# Altium PCB Modulo_Telemetros.PcbDoc
Units mil, origin at the board's own origin, x right, y up, seen from the top; angles counter-clockwise.
Board outline 3660 x 4090 mil, 2 copper layers (Top Layer, Bottom Layer); 58 components, 57 nets, 198 pads, 7 vias.
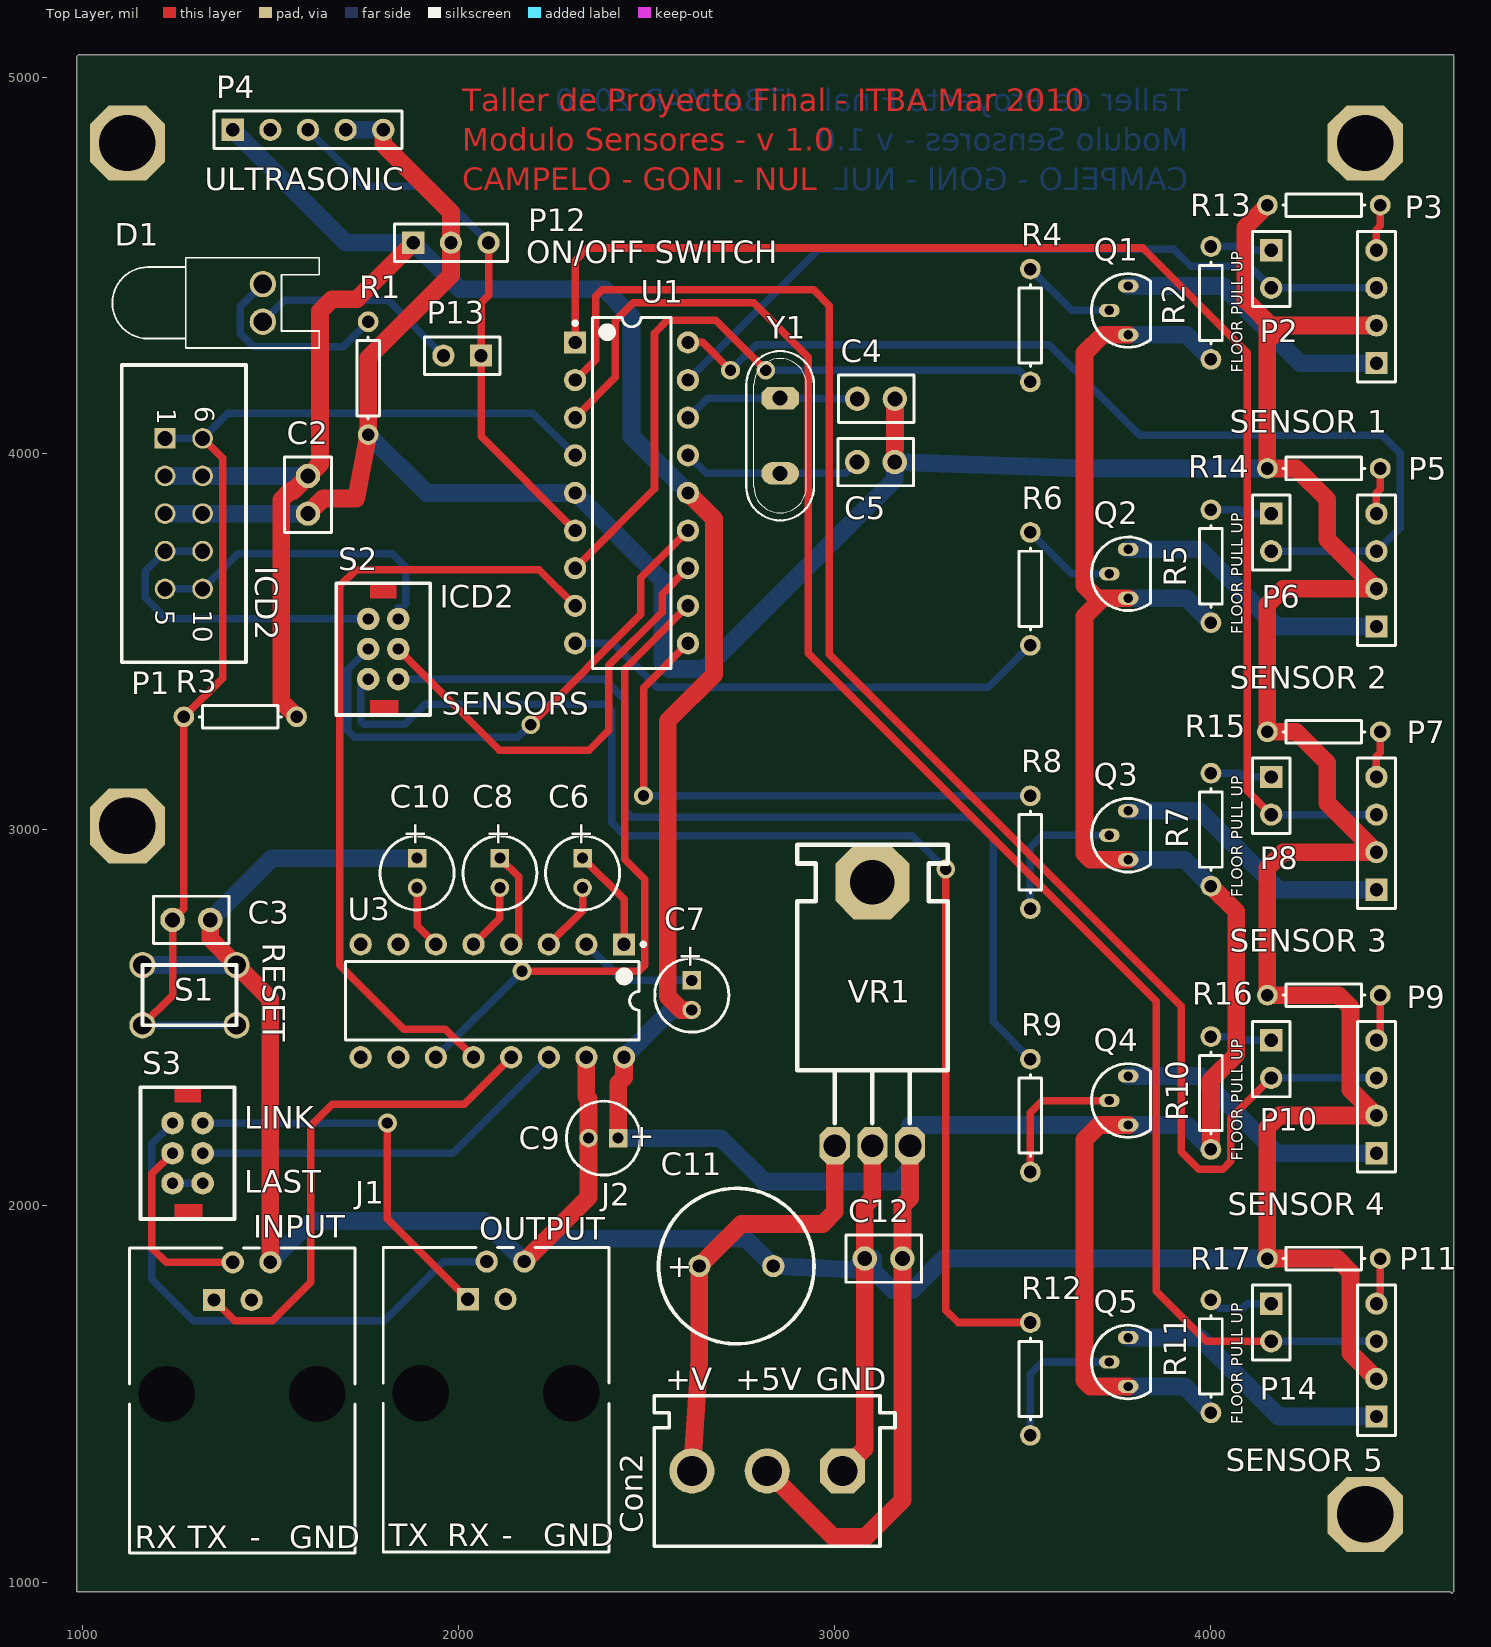
[diagram p0: Top Layer view]
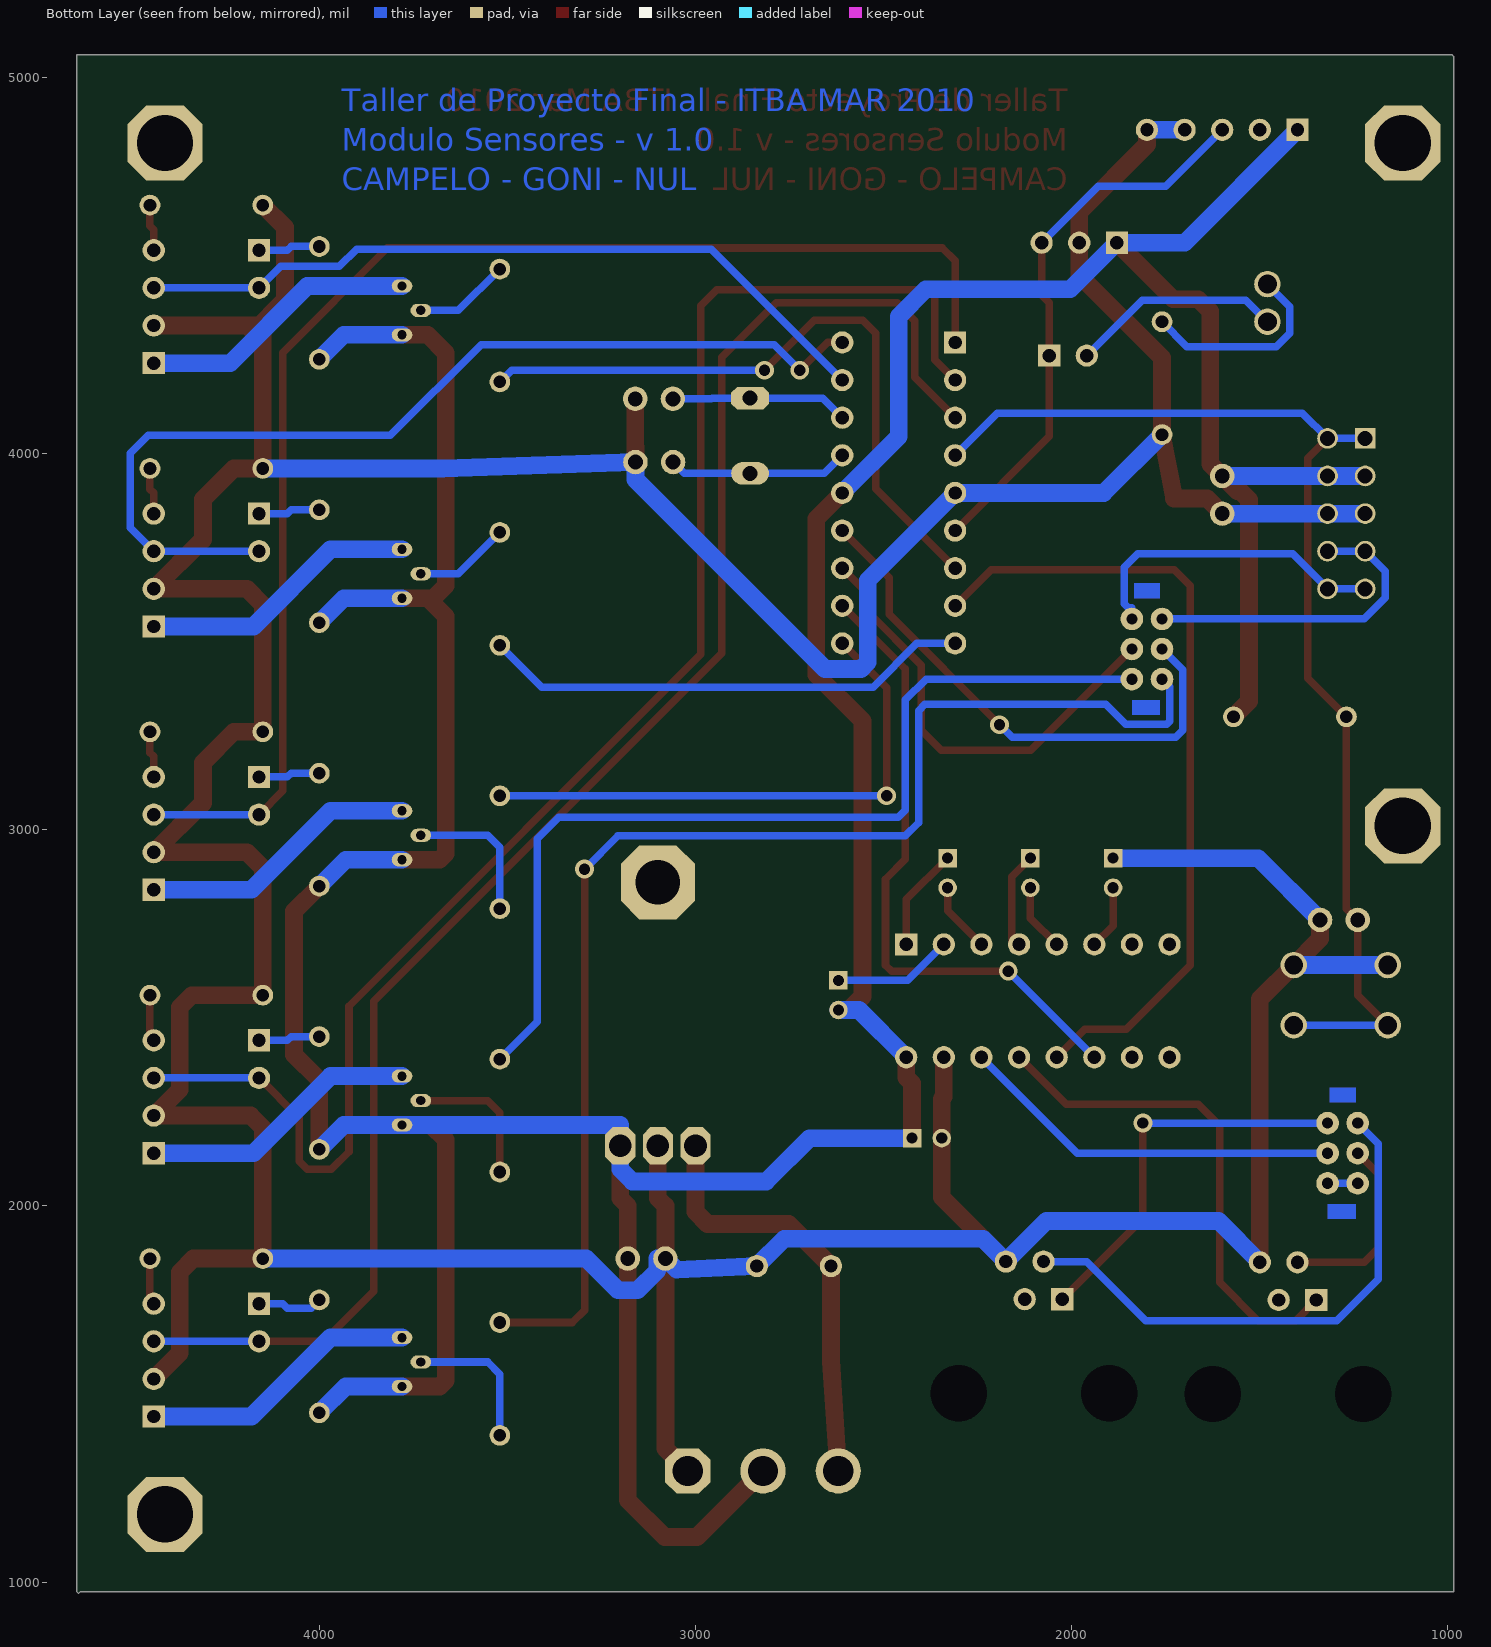
[diagram p1: Bottom Layer view, seen from below]

## Layer stack, top to bottom
Top Layer: signal copper 1.4
Dielectric: dielectric 12.6, FR-4, Dk 4.8
Bottom Layer: signal copper 1.4

## Board outline
985,5055 985,975 4635,975 4640,970 4645,975 4645,5060 990,5060 985,5055

## Design rules (kind name [scope] priority, off if disabled: settings)
Clearance [All] p1: gap=15
DiffPairsRouting [All] p1: maxlimit=10 minlimit=10 mostfreqgap=10 maxuncoupledlength=750
PolygonConnect [All] p1: connectstyle=Relief reliefconductorwidth=10 reliefentries=4 polygonreliefangle="90 Angle"
RoutingVias [All] p1: holewidth=30 width=50 viastyle="Through Hole" minholewidth=30 minwidth=50 maxholewidth=50 maxwidth=70
SilkscreenOverComponentPads [All] p1: minsilkscreentomaskgap=10
SolderMaskExpansion [All] p1: expansion=4
Width Signal [NOT (InNet('+5V VCC') OR InNet('+V LOGIC') OR InNet('GND') OR InNet('VCC_SENSOR_1') OR InNet('VCC_SENSOR_2') OR InNet('VCC_SENSOR_3') OR InNet('VCC_SENSOR_4') OR InNet('VCC_SENSOR_5'))] p1: maxlimit=25 minlimit=15 preferedwidth=20 minimp=50.000000 maximp=50.000000 favimp=50.000000
Width Power [(InNet('+5V VCC') OR InNet('+V LOGIC') OR InNet('GND') OR InNet('VCC_SENSOR_1') OR InNet('VCC_SENSOR_2') OR InNet('VCC_SENSOR_3') OR InNet('VCC_SENSOR_4') OR InNet('VCC_SENSOR_5'))] p2: maxlimit=47 minlimit=47 preferedwidth=47 minimp=50.000000 maximp=50.000000 favimp=50.000000
26 further rules are at their usual default settings.

## Components (designator, comment, footprint, x,y, rotation, side; value= is the part's Value field where it differs from the comment)
C2 "Cap" CAPR2.54-5.1x3.2 1600,3890 r90 top
C3 "Cap" CAPR2.54-5.1x3.2 1290,2760 r180 top
C4 "Cap" CAPR2.54-5.1x3.2 3110,4145 r180 top
C5 "Cap" CAPR2.54-5.1x3.2 3109.61,3977.01 r180 top
C6 "Cap Pol1" CAPPR2-5x6.8 2330,2885 r270 top
C7 "Cap Pol1" CAPPR2-5x6.8 2620,2560 r270 top
C8 "Cap Pol1" CAPPR2-5x6.8 2110,2885 r270 top
C9 "Cap Pol1" CAPPR2-5x6.8 2385,2180 r180 top
C10 "Cap Pol1" CAPPR2-5x6.8 1890,2885 r270 top
C11 "Cap Pol1" RB5-10.5 2738.43,1840 r0 top
C12 "Cap" CAPR2.54-5.1x3.2 3130,1860 r0 top
Con2 "POWER_A" My_CN3 3120,1095 r180 top
D1 "LED0" LED-0 1480,4400 r270 top
J1 "SERIAL A" 15-43-6245 1425,1077.95 r0 top
J2 "SERIAL B" 15-43-6245 2100,1080 r0 top
P1 "ICD2" HEADER10_5x2_B 1270,3840 r270 top
P2 "Pull UP (Piso)" HDR1X2 4160,4540 r270 top
P3 "Piso/Telemetro_1" HDR1X4 4440,4240 r90 top
P4 "Ultradonido" HDR1X5 1400,4860 r0 top
P5 "Piso/Telemetro_2" HDR1X4 4440,3540 r90 top
P6 "Pull UP (Piso)" HDR1X2 4160,3840 r270 top
P7 "Piso/Telemetro_3" HDR1X4 4440,2840 r90 top
P8 "Pull UP (Piso)" HDR1X2 4160,3140 r270 top
P9 "Piso/Telemetro_4" HDR1X4 4440,2140 r90 top
P10 "Pull UP (Piso)" HDR1X2 4160,2440 r270 top
P11 "Piso/Telemetro_5" HDR1X4 4440,1440 r90 top
P12 "ON/OFF SWITCH" HDR1X3 1880,4560 r0 top
P13 "LED1" HDR1X2 2060,4260 r180 top
P14 "Pull UP (Piso)" HDR1X2 4160,1740 r270 top
Q1 "BC327" TO-92A 3780,4380 r0 top
Q2 "BC327" TO-92A 3780,3680 r0 top
Q3 "BC327" TO-92A 3780,2985 r0 top
Q4 "BC327" TO-92A 3780,2280 r0 top
Q5 "BC327" TO-92A 3780,1585 r0 top
R1 "Res1" AXIAL-0.3 1760,4200 r270 top
R2 "Res1" AXIAL-0.3 4000,4400 r90 top (schematic designator R5)
R3 "Res1" AXIAL-0.3 1420,3300 r0 top
R4 "Res1" AXIAL-0.3 3520,4340 r90 top
R5 "Res1" AXIAL-0.3 4000,3700 r90 top (schematic designator R7)
R6 "Res1" AXIAL-0.3 3520,3640 r90 top
R7 "Res1" AXIAL-0.3 4000,3000 r90 top (schematic designator R10)
R8 "Res1" AXIAL-0.3 3520,2940 r270 top
R9 "Res1" AXIAL-0.3 3520,2240 r270 top
R10 "Res1" AXIAL-0.3 4000,2300 r90 top (schematic designator R11)
R11 "Res1" AXIAL-0.3 4000,1600 r90 top (schematic designator R13)
R12 "Res1" AXIAL-0.3 3520,1540 r270 top
R13 "Res1" AXIAL-0.3 4300,4660 r0 top
R14 "Res1" AXIAL-0.3 4300,3960 r0 top
R15 "Res1" AXIAL-0.3 4300,3260 r0 top
R16 "Res1" AXIAL-0.3 4300,2560 r0 top
R17 "Res1" AXIAL-0.3 4300,1860 r0 top
S1 "SW-PB" TS-063 1285,2560 r0 top
S2 "PROGRAM SELECTION" LD-202mini 1800,3480 r270 top
S3 "SERIAL CHAIN" LD-202mini 1280,2140 r270 top
U1 "PIC16F88" PDIP300-P18 2460,3895 r0 top
U3 "MAX232" PE16A 2090,2545 r270 top
VR1 "7805" My_TO-220 3000.51,2160.51 r0 top
Y1 "20MHz" My_Crystal 2855,4047.01 r270 top

## Footprints (in the part's own frame and the unit in brackets; to place one, negate y for a bottom-side part, rotate by r counter-clockwise, add the part's x,y. Pads: shape width x height; smd on the part's side, far side on the other; paste and mask are expansions set on the pad)
15-43-6245 [mm] "Connector; PCB Jack, Thru-Hole; 1-Port; Unshielded without Lightpipes; Right Angle"
  rect 1.5x1.5 hole 0.9: 1(-1.905,17.07)
  round 1.5 hole 0.9: 2(-0.635,19.61) 3(0.635,17.07) 4(1.905,19.61)
  round 2.95 hole 3.81 unplated: MH1(-5.08,10.72) MH2(5.08,10.72)
  silkscreen extent -7.62,0 7.62,20.57
AXIAL-0.3 [mm] "Axial Device, Thru-Hole; 2 Leads; 0.3 in Pin Spacing"
  round 1.4 hole 0.85: 1(-3.81,0) 2(3.81,0)
  silkscreen extent -2.77,-0.76 2.77,0.76
CAPPR2-5x6.8 [mm] "Capacitor, Electrolytic, Radial; Body 5 x 6.8 mm (Dia.xH typ); Pin Spacing 2 mm (typ)"
  rect 1.25x1.25 hole 0.75: 1(-1,0)
  round 1.25 hole 0.75: 2(1,0)
  silkscreen extent -2.5,-2.5 2.5,2.5
CAPR2.54-5.1x3.2 [mm] "Capacitor, Ceramic, Thru-Hole, Dipped Radial; Body 5.1 x 3.2 mm (WxT) Pin Spacing 2.54 mm (typ)"
  round 1.65 hole 1: 1(-1.27,0) 2(1.27,0)
  silkscreen extent -2.55,-1.6 2.55,1.6
HDR1X2 [mm] "Connector; Header; 2 Position"
  rect 1.5x1.5 hole 0.9: 1(0,0)
  round 1.5 hole 0.9: 2(2.54,0)
  silkscreen extent -1.27,-1.27 3.81,1.27
HDR1X3 [mm] "Connector; Header; 3 Position"
  rect 1.5x1.5 hole 0.9: 1(0,0)
  round 1.5 hole 0.9: 2(2.54,0) 3(5.08,0)
  silkscreen extent -1.27,-1.27 6.35,1.27
HDR1X4 [mm] "Connector; Header; 4 Position"
  rect 1.5x1.5 hole 0.9: 1(0,0)
  round 1.5 hole 0.9: 2(2.54,0) 3(5.08,0) 4(7.62,0)
  silkscreen extent -1.27,-1.27 8.89,1.27
HDR1X5 [mm] "Connector; Header; 5 Position"
  rect 1.5x1.5 hole 0.9: 1(0,0)
  round 1.5 hole 0.9: 2(2.54,0) 3(5.08,0) 4(7.62,0) 5(10.16,0)
  silkscreen extent -1.27,-1.27 11.43,1.27
HEADER10_5x2_B [mil] "Header con polaridad para 10 pines (5x2)"
  rect 55x55 hole 40: 1(-200,-50)
  round 55 hole 40: 2(-100,-50) 3(0,-50) 4(100,-50) 5(200,-50) 6(-200,50) 7(-100,50) 8(0,50) 9(100,50) 10(200,50)
  silkscreen extent -395,-165 395,165
LD-202mini [mil] "Doble inversor mini 90 grados"
  round 60 hole 30: 1(0,40) 2(-80,40) 3(80,40) 4(0,-40) 5(-80,-40) 6(80,-40)
  Multi-Layer region: -175,-35 -135,-35 -135,35 -175,35
  Multi-Layer region: 135,-35 175,-35 175,40 135,40
  silkscreen extent -175,-125 175,125
LED-0 [mil] "Typical INFRARED GaAs LED; 2 Leads"
  round 70 hole 50: 1(50,0) 2(-50,0)
  silkscreen extent -120,-400 120,150
My_CN3 [mil]
  oct 120x120 hole 80: 1(99.5,-200.5)
  round 120 hole 80: 2(299.5,-200.5) 3(499.5,-200.5)
  silkscreen extent -40,-400 600,0
My_Crystal [mil]
  oct 60x100 hole 40: 1(-100,0)
  oval 60x100 hole 40: 2(100,0)
  silkscreen extent -225,-90 225,90
My_TO-220 [mil]
  oct 196.85x196.85 hole 118.11: 0(99.49,699.49)
  oct 80x100 hole 60: 1(-0.5,-0.5) 2(99.5,-0.5) 3(199.5,-0.5)
  silkscreen extent -100,60 300,800
PDIP300-P18 [mm] "DIP, 18-Leads, Row Spacing 7.62mm, Pitch 2.54mm, Body 22.9x6.6mm"
  rect 1.5x1.5 hole 0.9: 1(-3.81,10.16)
  round 1.5 hole 0.9: 2(-3.81,7.62) 3(-3.81,5.08) 4(-3.81,2.54) 5(-3.81,0) 6(-3.81,-2.54) 7(-3.81,-5.08) 8(-3.81,-7.62) 9(-3.81,-10.16) 10(3.81,-10.16) 11(3.81,-7.62) 12(3.81,-5.08) 13(3.81,-2.54) 14(3.81,0) 15(3.81,2.54) 16(3.81,5.08) 17(3.81,7.62) 18(3.81,10.16)
  silkscreen extent -3.93,-11.85 2.65,11.85, body extent -3.6,-11.8 3.6,11.8, height 5.34
PE16A [mm] "DIP, 16-Leads, Row Spacing 7.62mm, Pitch 2.54mm, Body 19.18x6.99mm"
  rect 1.5x1.5 hole 0.9: 1(-3.81,8.89)
  round 1.5 hole 0.9: 2(-3.81,6.35) 3(-3.81,3.81) 4(-3.81,1.27) 5(-3.81,-1.27) 6(-3.81,-3.81) 7(-3.81,-6.35) 8(-3.81,-8.89) 9(3.81,-8.89) 10(3.81,-6.35) 11(3.81,-3.81) 12(3.81,-1.27) 13(3.81,1.27) 14(3.81,3.81) 15(3.81,6.35) 16(3.81,8.89)
  silkscreen extent -3.93,-9.9 2.65,10.32, body extent -3.3,-9.9 3.3,9.9, height 5.08
RB5-10.5 [mm] "Motor, General Kind; 2 Leads"
  round 1.5 hole 0.9: 1(-2.5,0) 2(2.5,0)
  silkscreen extent -5.25,-5.25 5.25,5.25
TO-92A [mil] "TO, Flat Index; 3 In-Line, Axial Leads; Body Dia. 4.5mm; Leads 0.51 x 0.48 mm (max)"
  oval 55x35 hole 25: 1(0,-65) 2(-50,0) 3(0,65)
  silkscreen extent -98,-98 59,98
TS-063 [mil] "Boton normal abierto"
  round 70 hole 50: 1(-125,80) 1(125,80) 2(-125,-80) 2(125,-80)
  silkscreen extent -125,-80 125,80

## Part data
C2 C3 C4 C5 C12: "Capacitor"
C6 C7 C8 C9 C10 C11: "Polarized Capacitor (Radial)"
Con2: library part "CON3 pin Green", "Connector green screw"
D1: "Typical INFRARED GaAs LED"
J1 J2: library part 15-43-6245, "Right Angle, Standard Profile, RJ45-Keyed, Flange Mount PCB Jack"
P1: library part "Header 5X2A", "Header, 5-Pin, Dual row"
P2 P6 P8 P10 P13 P14: library part "Header 2", "Header, 2-Pin"
P3 P5 P7 P9 P11: library part "Header 4", "Header, 4-Pin"
P4: library part "Header 5", "Header, 5-Pin"
P12: library part "Header 3", "Header, 3-Pin"
Q1 Q2 Q3 Q4 Q5: library part 2N5771, "PNP Switching Transistor"
R1 R2 R3 R4 R5 R6 R7 R8 R9 R10 R11 R12 R13 R14 R15 R16 R17: "Resistor"
S1: "Switch"
S2 S3: library part SW-DPDT, "Double-Pole, Double-Throw Switch"
U1: library part PIC16F88-E/P, "Enhanced FLASH Microcontroller with nanoWatt Technology, 10-Bit A/D, 4K (x14-Bit words) FLASH, 368 Bytes RAM, 18-Pin PDIP, Standard VDD Range, Extended Temperature"
U3: library part MAX232ACPE, "+5V Powered, Multi-Channel RS-232 Driver/Receiver"
VR1: library part "Volt Reg", "Voltage Regulator"
Y1: library part XTAL, "Crystal Oscillator"

## Free pads (board coordinates)
  oct 200x200 hole 150: 1(1120,3010) 1(1120,4825) 1(4410,1180) 1(4410,4825)

## Via types
v1: diameter 50, hole 30, Top Layer to Bottom Layer, 7 vias

## Nets (pads, with @x,y where several pads share a name; then routed paths per layer and width w, separated by ;. In a path a pad name is that pad's centre, name@x,y a point inside that pad or via, vN(x,y) a via of type N, cw(c..) or ccw(c..) an arc to the next point about the centre after c; other vN are vias at no path point)
"+5V VCC": C2.2 C7.2 C9.1 C12.2 Con2.2 P1.2 P1.7 P4.1 P12.1 Q1.1 Q2.1 Q3.1 Q4.1 Q5.1 R2.1 R3.2 R5.1 R7.1 R10.1 R11.1 U1.14 U3.16 VR1.3 | length 13213.4
  Top Layer w47: R3.2 1529,3341 1529,3877 1552,3900 1560,3900 C2.2 1632,3972 1632,4378.06 1664,4410.06 1730.06,4410.06 P12.1 ; C9.1 2424.37,2325.74 2440,2341.37 U3.16 ; U1.14 2679,3826 2679,3412 2556,3289 2556,2556.63 2592,2520.63 C7.2 ; Con2.2 2996,1120 3082,1120 3180,1218 C12.2 3180,2000 3200.01,2020.01 VR1.3 ; Q5.1 3680,1520 3664,1536 3664,2176 3703,2215 Q4.1 ; Q3.1 3680,2920 3664,2936 3664,3567 3712,3615 ; Q1.1 3712,4315 3664,4267 3664,3648 3697,3615 3712,3615 ; R10.1 4000,2335 4067,2402 4067,2783 R7.1 ; 3712,3615 Q2.1 3712,3615
  Bottom Layer w47: P1.2 P1.7 C2.2 ; P4.1 1700,4560 P12.1 2004,4436 2388,4436 2460,4364 2460,4045 U1.14 ; C9.1 2697,2180 2811.99,2065.01 3168,2065.01 3200.01,2097.02 VR1.3 3200.01,2215 Q4.1 3935,2215 R10.1 ; U3.16 2565.63,2520.63 C7.2 ; Q5.1 3930,1520 R11.1 ; Q3.1 3930,2920 R7.1 ; Q2.1 3935,3615 R5.1 ; Q1.1 3935,4315 R2.1
"+V LOGIC": C11.1 Con2.3 VR1.1 | length 1140.8
  Top Layer w47: Con2.3 2640,1587.5 C11.1 2752,1952 2968.01,1952 3000.01,1984 VR1.1
GND: C2.1 C3.1 C4.1 C5.1 C9.2 C10.1 C11.2 C12.1 Con2.1 J1.4 J2.4 P1.3 P1.8 P3.2 P4.4 P4.5 P5.2 P7.2 P9.2 P11.2 P12.2 R1.2 R13.1 R14.1 R15.1 R16.1 R17.1 S1.1 U1.5 U3.15 VR1.2 | length 16612.2
  Top Layer w47: C3.1 1340,2710 1410,2640 1500,2550 J1.4 ; C2.1 1640,3880 1728,3880 R1.2 1760,4254 1980,4474 P12.2 1980,4641 1800,4821 P4.5 ; J2.4 2345.63,2022.68 C9.2 2345.63,2284 2340,2289.63 U3.15 ; Con2.1 3080,1355 C12.1 3080,2000 3100.01,2020.01 VR1.2 ; C5.1 3159.61,4016.4 3160,4016.8 C4.1 ; R13.1 4091,4601 4091,4408 4175.5,4323.5 ; P11.2 4371,1609 4371,1824 4335,1860 R17.1 4150,2208 4182,2240 P9.2 4371,2309 4371,2528 4339,2560 R16.1 4150,2898 4192,2940 P7.2 4309,3071 4309,3178 4227,3260 R15.1 4150,3598 4192,3640 P5.2 4309,3771 4309,3878 4227,3960 R14.1 4150,4298 ; 4150,4298 4175.5,4323.5 ; 4150,4298 4150,4340 P3.2 4192,4340 4175.5,4323.5
  Bottom Layer w47: S1.1@1160,2640 S1.1@1410,2640 ; P1.3 P1.8 C2.1 ; C3.1 1504.37,2924.37 C10.1 ; J1.4 1610,1960 2067.05,1960 J2.4 2235.95,1913 2763.85,1913 C11.2 3050,1830 C12.1 3102,1860 3102,1828 3154,1776 3206,1776 3290,1860 R17.1 ; P4.4 P4.5 ; R1.2 1915,3895 U1.5 2541.97,3663.03 2541.97,3445 2560,3426.97 2656,3426.97 3159.61,3930.58 C5.1 3672.01,3960 R14.1
ICD2_CLK: P1.5 P1.10 S2.2 | length 844.6
  Bottom Layer w20: P1.5 P1.10 1413,3733 1824,3733 1860,3697 1860,3600 1850,3590 1840,3590 S2.2
ICD2_CLK/RB6: S2.1 U1.12 | length 1211.4
  Top Layer w20: S2.1 2109.06,3210.94 2346.89,3210.94 2399.94,3264 2399.94,3437.45 2541,3578.5 2541,3626 U1.12
ICD2_DATA: P1.4 P1.9 S2.5 | length 862.1
  Bottom Layer w20: P1.9 P1.4 1167,3687 1167,3616 1223,3560 S2.5
ICD2_DATA/RB7: S2.4 U1.13 | length 1436.9
  Top Layer w20: v1(2192,3279) 2485,3572 2485,3670 U1.13
  Bottom Layer w20: S2.4 1705,3425 1705,3264 1724,3245 2158,3245 v1(2192,3279)
LED1: D1.1 P13.2 | length 564.5
  Bottom Layer w20: D1.1 1537,4407 1813,4407 P13.2
MAX_TX: S3.1 U3.14 | length 1025.6
  Bottom Layer w20: S3.1 1985,2140 U3.14
MCLR: C3.2 P1.1 P1.6 R3.1 S1.2 U1.4 | length 3084.3
  Top Layer w20: S1.2@1160,2480 1240,2560 C3.2 1270,2790 R3.1 1373,3403 1373,3987 P1.6
  Bottom Layer w20: S1.2@1160,2480 S1.2@1410,2480 ; P1.1 P1.6 1387,4107 2198,4107 U1.4
NetC4_2: C4.2 U1.16 Y1.1 | length 472.4
  Bottom Layer w20: U1.16 2662.01,4147.01 Y1.1 2956,4147.01 2958.01,4145 C4.2
NetC5_2: C5.2 U1.15 Y1.2 | length 481.9
  Bottom Layer w20: U1.15 2657.99,3947.01 Y1.2 3029.61,3947.01 C5.2
NetC6_1: C6.1 U3.1 | length 274.9
  Top Layer w20: C6.1 2440,2814.37 U3.1
NetC6_2: C6.2 U3.3 | length 187.9
  Top Layer w20: U3.3 2330,2785 C6.2
NetC7_1: C7.1 U3.2 | length 319.6
  Bottom Layer w20: U3.2 2435.63,2599.37 C7.1
NetC8_1: C8.1 U3.4 | length 270.1
  Top Layer w20: C8.1 2160,2874.37 2160,2695 U3.4
NetC8_2: C8.2 U3.5 | length 179.6
  Top Layer w20: U3.5 2110,2765 C8.2
NetC10_2: C10.2 U3.6 | length 171.3
  Top Layer w20: C10.2 1890,2745 U3.6
NetD1_2: D1.2 R1.1 | length 537.1
  Bottom Layer w20: D1.2 1420,4390 1420,4320 1456,4284 1694,4284 R1.1
NetP2_1: P2.1 R2.2 | length 164.1
  Bottom Layer w20: R2.2 4075,4550 4085,4540 P2.1
NetP3_4: P3.4 R13.2 | length 124.1
  Top Layer w20: P3.4 4440,4595 4450,4605 R13.2
NetP5_4: P5.4 R14.2 | length 124.1
  Top Layer w20: P5.4 4440,3895 4450,3905 R14.2
NetP6_1: P6.1 R5.2 | length 164.1
  Bottom Layer w20: R5.2 4075,3850 4085,3840 P6.1
NetP7_4: P7.4 R15.2 | length 124.1
  Top Layer w20: P7.4 4440,3195 4450,3205 R15.2
NetP8_1: P8.1 R7.2 | length 164.1
  Bottom Layer w20: R7.2 4075,3150 4085,3140 P8.1
NetP9_4: P9.4 R16.2 | length 124.1
  Top Layer w20: P9.4 4450,2450 R16.2
NetP10_1: P10.1 R10.2 | length 164.1
  Bottom Layer w20: R10.2 4075,2450 4085,2440 P10.1
NetP11_4: P11.4 R17.2 | length 124.1
  Top Layer w20: P11.4 4450,1750 R17.2
NetP14_1: P14.1 R11.2 | length 174.1
  Bottom Layer w20: R11.2 4022,1728 4085,1728 4097,1740 P14.1
NetQ1_2: Q1.2 R4.2 | length 255.6
  Bottom Layer w20: R4.2 3630,4380 Q1.2
NetQ2_2: Q2.2 R6.2 | length 255.6
  Bottom Layer w20: R6.2 3630,3680 Q2.2
NetQ3_2: Q3.2 R8.2 | length 386.3
  Bottom Layer w20: R8.2 3520,2953 3552,2985 Q3.2
NetQ4_2: Q4.2 R9.2 | length 381.3
  Top Layer w20: R9.2 3520,2248 3552,2280 Q4.2
NetQ5_2: Q5.2 R12.2 | length 386.3
  Bottom Layer w20: R12.2 3520,1553 3552,1585 Q5.2
NetS3_3: S3.3 S3.6 | length 80
  Bottom Layer w20: S3.6 S3.3
PIC_RX: U1.8 U3.12 | length 2147.1
  Top Layer w20: U3.12 1965,2470 1855,2470 1685,2640 1685,3648 1728,3691 2214,3691 U1.8
PIC_TX: U1.11 U3.11 | length 1703
  Top Layer w20: v1(2169,2624) 2479,2624 2495,2640 2495,2868 2442,2921 2442,3427 U1.11
  Bottom Layer w20: U3.11 v1(2169,2624)
SENSE_1: P2.2 P3.3 U1.17 | length 2016.8
  Bottom Layer w20: U1.17 2958,4543 3901,4543 3947,4497 4103,4497 P2.2 P3.3
SENSE_2: P5.3 P6.2 U1.18 | length 2637.6
  Top Layer w20: U1.18 2649,4295 v1(2723,4221)
  Bottom Layer w20: v1(2723,4221) 2791,4289 3570,4289 3811,4048 4455,4048 4503,4000 4503,3803 P5.3 P6.2
SENSE_3: P7.3 P8.2 U1.1 | length 3667.3
  Top Layer w20: U1.1 2310,4512 2344,4546 3819,4546 4097,4268 4097,3103 P8.2
  Bottom Layer w20: P8.2 P7.3
SENSE_4: P9.3 P10.2 U1.2 | length 4234
  Top Layer w20: U1.2 2364.53,4249.53 2364.53,4417.53 2382,4435 2944,4435 2986,4393 2986,3466 3921,2531 3921,2144 3968,2097 4032,2097 4053,2118 4053,2233 P10.2
  Bottom Layer w20: P10.2 P9.3
SENSE_5: P11.3 P14.2 U1.3 | length 4400.1
  Top Layer w20: U1.3 2417.1,4202.1 2417.1,4353.1 2464,4400 2785.1,4400 2930,4255.1 2930,3469 3855,2544 3855,1773 3988,1640 P14.2
  Bottom Layer w20: P14.2 P11.3
SENSOR_1: R4.1 U1.7 | length 1793.4
  Top Layer w20: U1.7 2521,3906 2521,4320 2555,4354 2683.78,4354 v1(2816.78,4221)
  Bottom Layer w20: v1(2816.78,4221) 3489,4221 R4.1
SENSOR_2: R6.1 U1.9 | length 1304.5
  Bottom Layer w20: U1.9 2411.34,3495 2527.87,3378.47 3408.47,3378.47 R6.1
SENSOR_3: R8.1 U1.10 | length 1481.9
  Top Layer w20: v1(2492,3090) 2492,3377 U1.10
  Bottom Layer w20: v1(2492,3090) R8.1
SENSOR_4: R9.1 S2.3 | length 2555.3
  Bottom Layer w20: S2.3 2387,3400 2442,3345 2442,3052 2461,3033 3364,3033 3421,2976 3421,2489 R9.1
SENSOR_5: R12.1 S2.6 | length 3466.8
  Top Layer w20: v1(3295,2895) 3295,1723 3328,1690 R12.1
  Bottom Layer w20: S2.6 1740,3380 1740,3288 1748,3280 1857,3280 1910,3333 2390.38,3333 2407,3316.38 2407,3019 2442,2984 3206,2984 v1(3295,2895)
SERIAL_A_RX: J1.1 U3.13 | length 1346.4
  Top Layer w20: J1.1 1405,1695 1505,1695 1607,1797 1607,2213 1664,2270 2015,2270 U3.13
SERIAL_A_TX: J1.2 S3.4 | length 505.5
  Top Layer w20: S3.4 1185,2085 1185,1888 1223,1850 J1.2
SERIAL_B_RX: J2.2 S3.5 | length 1438.4
  Bottom Layer w20: S3.5 1185,2165 1185,1805 1295,1695 1803,1695 1960.05,1852.05 J2.2
SERIAL_B_TX: J2.1 S3.2 | length 1047.6
  Top Layer w20: v1(1811,2220) 1811,1966.05 J2.1
  Bottom Layer w20: S3.2 v1(1811,2220)
TRIGGER: P4.3 P12.3 P13.1 U1.6 | length 1481.1
  Top Layer w20: P12.3 2080,4420 2060,4400 P13.1 2060,4045 U1.6
  Bottom Layer w20: P4.3 1750,4710 1930,4710 P12.3
VCC_SENSOR_1: P3.1 Q1.3 | length 744.9
  Bottom Layer w47: Q1.3 4032,4445 4237,4240 P3.1
VCC_SENSOR_2: P5.1 Q2.3 | length 744.9
  Bottom Layer w47: Q2.3 3970,3745 4175,3540 P5.1
VCC_SENSOR_3: P7.1 Q3.3 | length 747
  Bottom Layer w47: Q3.3 3970,3050 4180,2840 P7.1
VCC_SENSOR_4: P9.1 Q4.3 | length 744.9
  Bottom Layer w47: Q4.3 3970,2345 4175,2140 P9.1
VCC_SENSOR_5: P11.1 Q5.3 | length 747
  Bottom Layer w47: Q5.3 3970,1650 4180,1440 P11.1
pads on no net: J1.3 J1.MH1 J1.MH2 J2.3 J2.MH1 J2.MH2 P4.2 U3.7 U3.8 U3.9 U3.10 VR1.0

## Other copper
Top Layer:
  text "Taller de Proyecto Final - ITBA Mar 2010" at 2010,4910 h60
  text "Modulo Sensores - v 1.0" at 2010,4805 h60
  text "CAMPELO - GONI - NUL" at 2010,4700 h60
Bottom Layer:
  text "Taller de Proyecto Final - ITBA MAR 2010" at 3940,4910 h60
  text "Modulo Sensores - v 1.0" at 3940,4805 h60
  text "CAMPELO - GONI - NUL" at 3940,4700 h60

## Silkscreen, mask and mechanical layers (free items; w line width, h text height)
Top Overlay:
  text "ULTRASONIC" at 1325,4700 h60
  text "ON/OFF SWITCH" at 2180,4505 h60
  text "FLOOR PULL UP" at 4085,4215 h30 r90
  text "SENSOR 1" at 4050,4055 h60
  text "ICD2" at 1950,3590 h60
  text "FLOOR PULL UP" at 4085,3520 h30 r90
  text "SENSOR 2" at 4050,3375 h60
  text "SENSORS" at 1955,3305 h60
  text "FLOOR PULL UP" at 4085,2820 h30 r90
  text "RESET" at 1480,2700 h60 r270
  text "SENSOR 3" at 4050,2675 h60
  text "LINK" at 1430,2205 h60
  text "FLOOR PULL UP" at 4085,2120 h30 r90
  text "LAST" at 1430,2035 h60
  text "SENSOR 4" at 4045,1975 h60
  text "INPUT" at 1455,1915 h60
  text "OUTPUT" at 2055,1910 h60
  text "+V" at 2550,1510 h60
  text "+5V" at 2735,1510 h60
  text "GND" at 2950,1510 h60
  text "FLOOR PULL UP" at 4085,1420 h30 r90
  text "SENSOR 5" at 4040,1295 h60
  text "TX" at 1815,1095 h60
  text "RX" at 1970,1095 h60
  text "-" at 2115,1095 h60
  text "GND" at 2225,1095 h60
  text "RX" at 1140,1090 h60
  text "TX" at 1280,1090 h60
  text "-" at 1445,1090 h60
  text "GND" at 1550,1090 h60

## Text inside footprints (layer, text, board x,y; h text height)
C6: Top Overlay "+" at 2300.47,3021.81 h59.06 r270
C7: Top Overlay "+" at 2590.47,2696.81 h59.06 r270
C8: Top Overlay "+" at 2080.47,3021.81 h59.06 r270
C9: Top Overlay "+" at 2521.81,2209.53 h59.06 r180
C10: Top Overlay "+" at 1860.47,3021.81 h59.06 r270
C11: Top Overlay "+" at 2553.43,1810 h59.06
P1: Top Overlay "1" at 1200,4120 h50 r270; Top Overlay "5" at 1195,3585 h50 r270; Top Overlay "10" at 1295,3585 h50 r270; Top Overlay "6" at 1300,4125 h50 r270